# Altium PCB PCB.PcbDoc
Units mm, origin at the board's own origin, x right, y up, seen from the top; angles counter-clockwise.
Board outline 38.34 x 25.39 mm, 2 copper layers (Top Layer, Bottom Layer); 21 components, 37 nets, 158 pads, 75 vias.
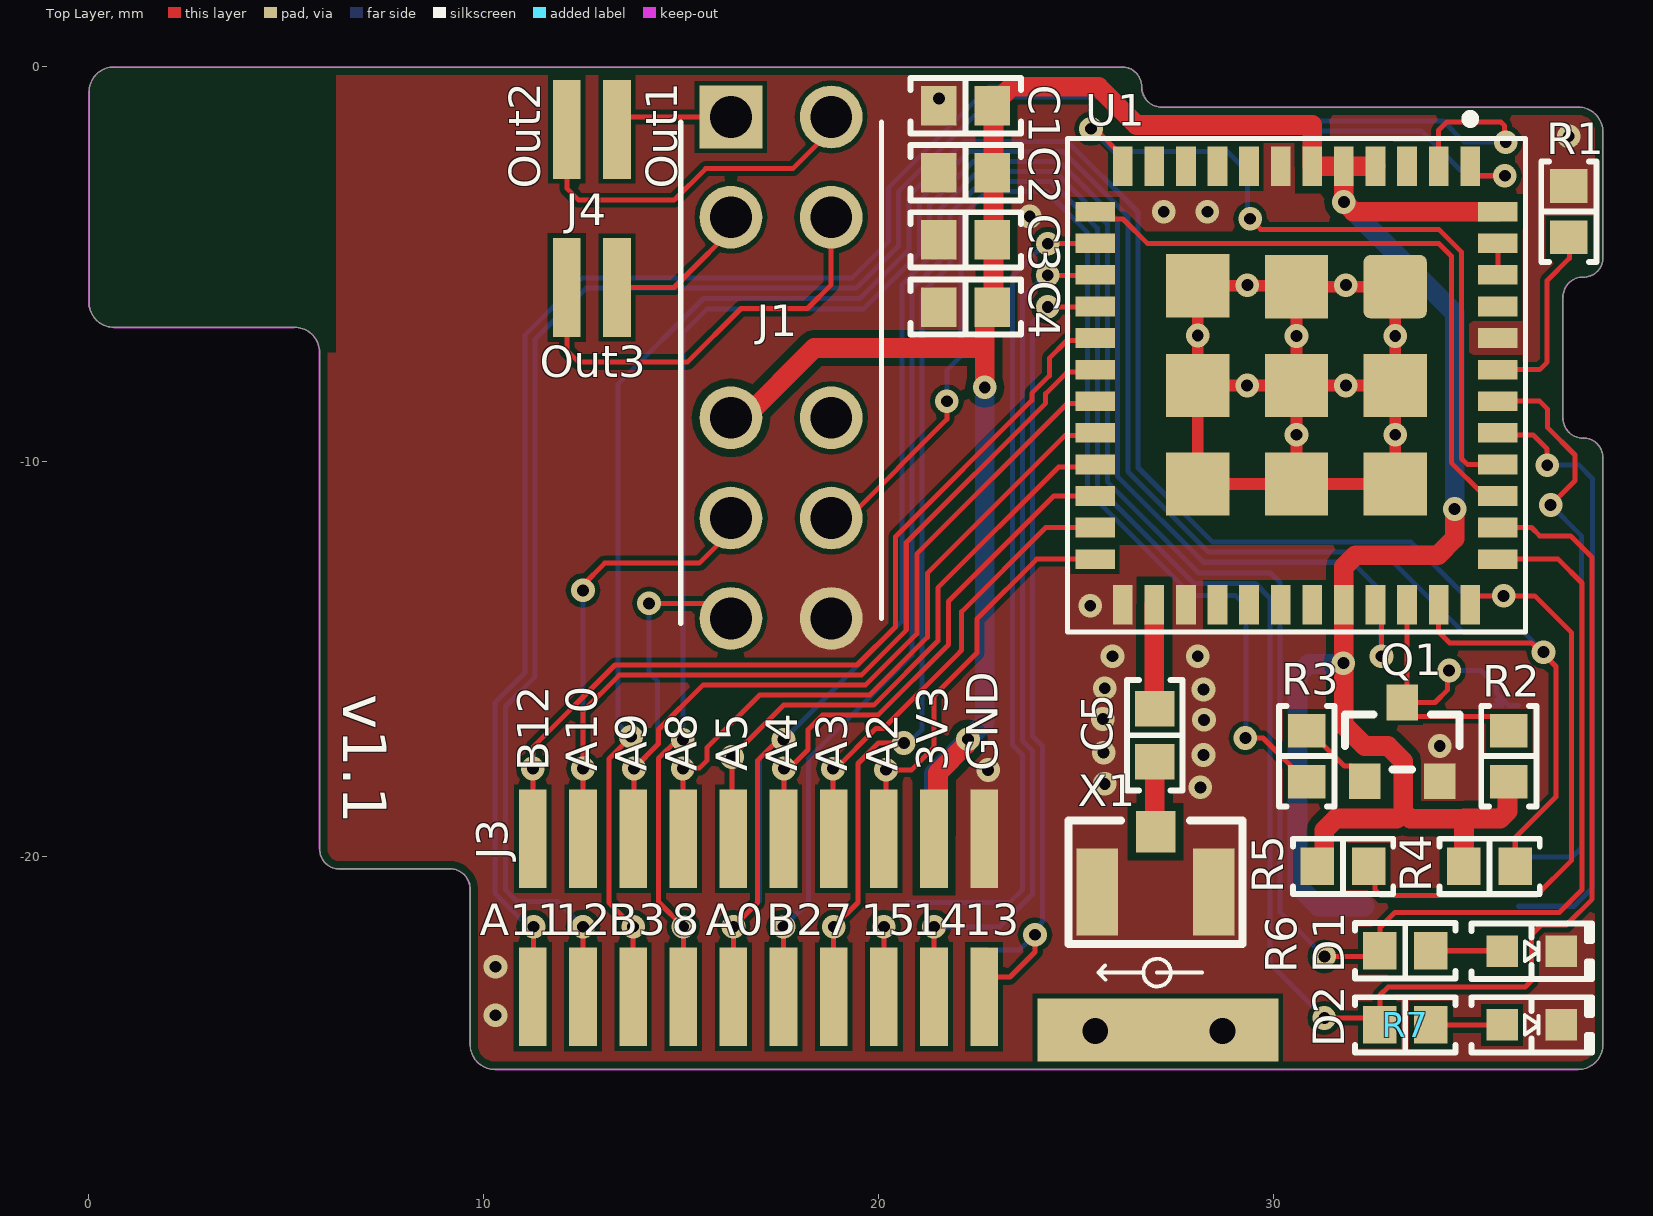
[diagram p0: Top Layer view]
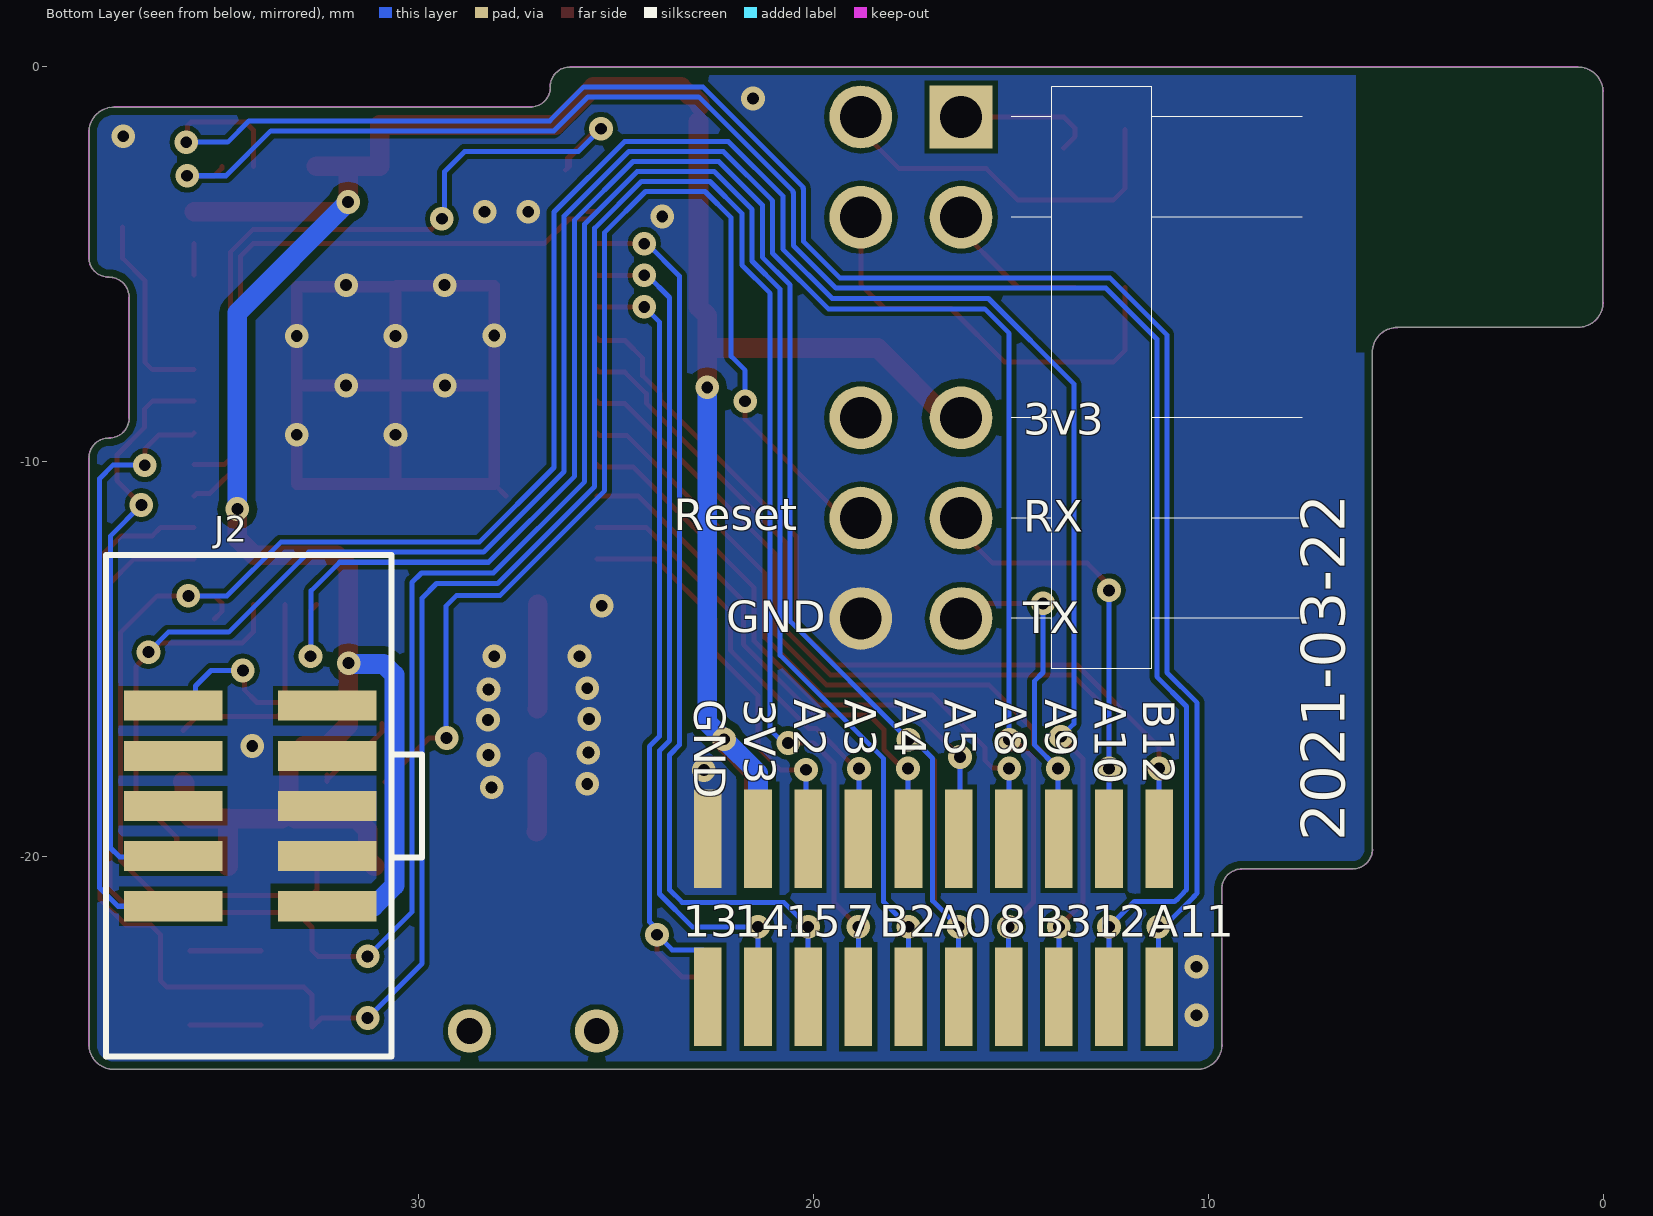
[diagram p1: Bottom Layer view, seen from below]
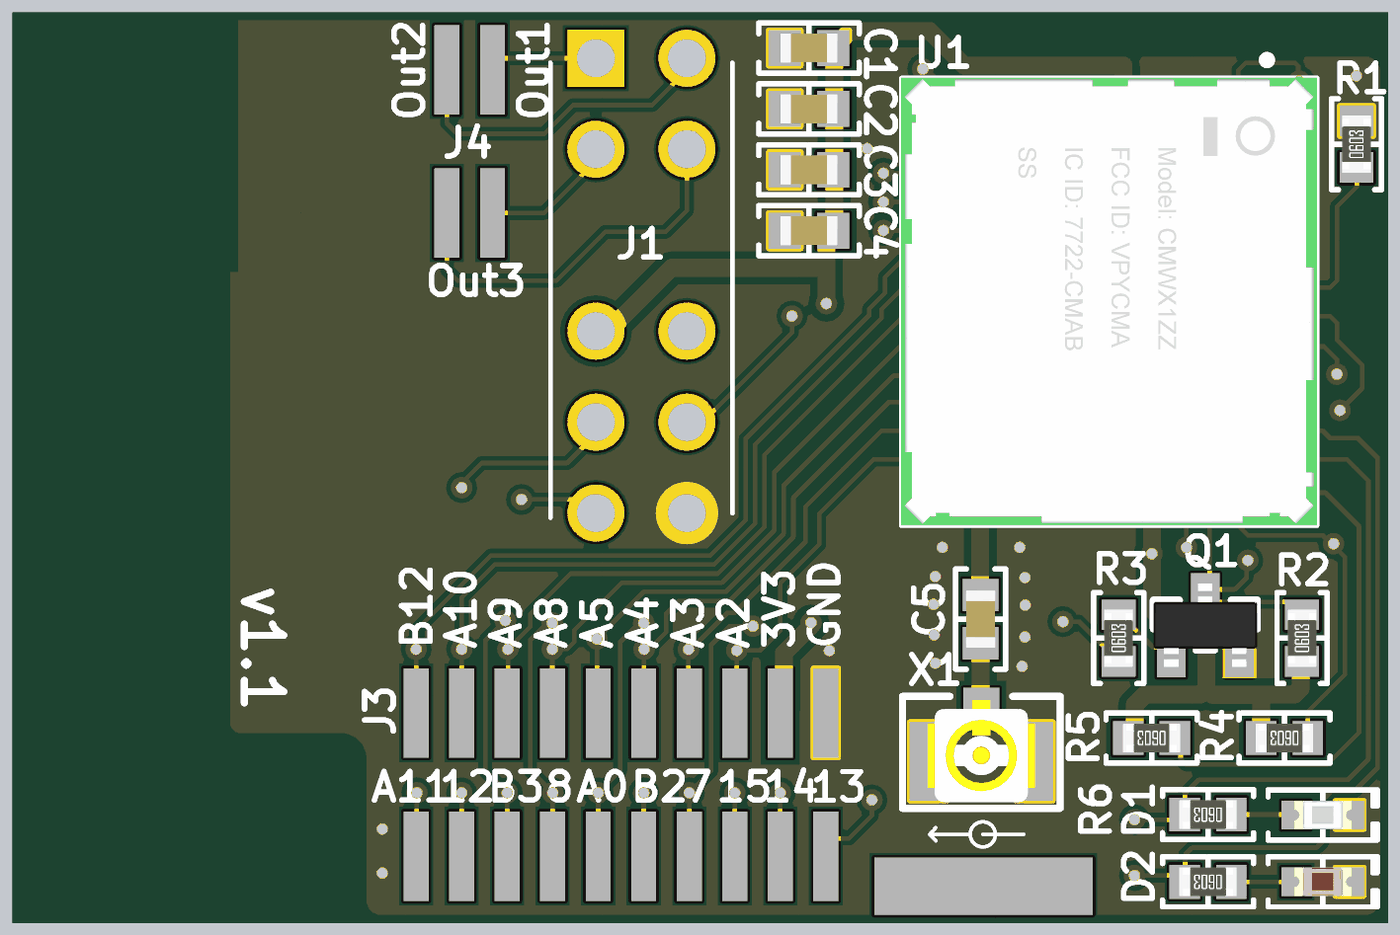
[diagram p2: 3D render of the assembled board from above, using the file's embedded part models]

## Layer stack, top to bottom
Top Solder: solder mask 0.0102, Solder Resist, Dk 3.5
Top Layer: signal copper 0.0356
Dielectric 1: dielectric 0.32, FR-4, Dk 4.8
Bottom Layer: signal copper 0.0356
Bottom Solder: solder mask 0.0102, Solder Resist, Dk 3.5

## Board outline
5.847,-19.82 5.847,-7.239 ccw(c5.205,-7.239) 5.205,-6.597 0.633,-6.597 cw(c0.633,-5.969) 0.005,-5.969 0.005,-0.635 cw(c0.633,-0.635) 0.633,-0.007 26.168,-0.007 cw(c26.168,-0.5) 26.661,-0.5 26.661,-0.516 ccw(c26.668,-0.516) 26.661,-0.516 ccw(c27.168,-0.516) 27.168,-1.023 ccw(c27.168,-0.516) 27.168,-1.023 37.717,-1.023 cw(c37.717,-1.651) 38.345,-1.651 38.345,-4.834 cw(c37.852,-4.834) 37.852,-5.327 37.836,-5.327 cw(c37.836,-5.834) 37.836,-5.327 ccw(c37.836,-5.334) 37.836,-5.327 ccw(c37.836,-5.834) 37.329,-5.834 37.329,-8.898 ccw(c37.336,-8.898) 37.329,-8.898 ccw(c37.836,-8.898) 37.836,-9.405 ccw(c37.836,-9.398) 37.836,-9.405 37.852,-9.405 cw(c37.852,-9.898) 38.345,-9.898 ccw(c38.352,-9.898) 38.347,-9.902 ccw(c38.352,-9.906) 38.345,-9.906 38.345,-24.765 cw(c37.717,-24.765) 37.717,-25.393 10.285,-25.393 cw(c10.285,-24.765) 9.657,-24.765 9.657,-20.82 ccw(c9.15,-20.82) 9.15,-20.313 6.34,-20.313 cw(c6.34,-19.82)

## Design rules (kind name [scope] priority, off if disabled: settings)
BoardOutlineClearance BoardOutlineClearance_BottomSIlk [OnLayer('Bottom Overlay')] p1: gap=0.05 ignorepadtopadclearanceinfootprint=FALSE
BoardOutlineClearance BoardOutlineClearance_TopSIlk [OnLayer('Top Overlay')] p2: gap=0.05 ignorepadtopadclearanceinfootprint=FALSE
BoardOutlineClearance [All] p3: gap=0.2 ignorepadtopadclearanceinfootprint=FALSE
Clearance Ant_Spacing [InPolygon vs (InNet('ANT') OR InNet('NetC5_2'))] p1: gap=0.2 ignorepadtopadclearanceinfootprint=FALSE
Clearance Ant_Spacing_1 [InPolygon vs InNet('+3.3V')] p2: gap=0.2 ignorepadtopadclearanceinfootprint=FALSE
Clearance [All] p3: gap=0.127 ignorepadtopadclearanceinfootprint=FALSE except(0.2: Arc-SMDPad Track-SMDPad; 0.25: Arc-Hole Track-Hole SMDPad-Hole THPad-Hole Via-Hole Fill-Hole Poly-Hole Region-Hole Text-Hole; 0.254: Arc-Via Track-Via)
ComponentClearance [All] p1: gap=0.127 collisioncheckmode=3 verticalgap=0.127 showdistances=TRUE
DiffPairsRouting [All] p1: maxlimit=0.254 minlimit=0.127 mostfreqgap=0.127 toplayer_minwidth=0.127 toplayer_maxwidth=25.4 toplayer_prefwidth=0.127 bottomlayer_minwidth=0.127 bottomlayer_maxwidth=25.4 bottomlayer_prefwidth=0.127 maxuncoupledlength=12.7
Height [All] p1: minheight=0 maxheight=1816.048 prefheight=12.7
HoleSize [All] p1: absolutevalues=TRUE maxlimit=6.3 minlimit=0.3 maxpercent=80.000 minpercent=20.000
HoleToHoleClearance [All] p1: gap=0.25 allowstackedmicrovias=FALSE
MinimumAnnularRing [All] p1: minimumring=0.076
MinimumSolderMaskSliver [All] p1: minsoldermaskwidth=0
PlaneClearance [All] p1: clearance=0.127
PlaneConnect PlaneConnectPowerPads [InPadClass('PowerPads')] p1: planeconnectstyle=Direct reliefexpansion=0.508 reliefentries=4 reliefconductorwidth=0.254 reliefairgap=0.254
PlaneConnect [All] p2: pad.planeconnectstyle=Relief pad.reliefexpansion=0.3 pad.reliefentries=4 pad.reliefconductorwidth=0.127 pad.reliefairgap=0.127 via.planeconnectstyle=Direct via.reliefexpansion=0.3 via.reliefentries=4 via.reliefconductorwidth=0.127 via.reliefairgap=0.127
PolygonConnect PolygonConnectPowerPads [All vs (InPadClass('PowerPads'))] p1: connectstyle=Direct reliefconductorwidth=0.254 reliefentries=4 polygonreliefangle="90 Angle" airgapwidth=0.254
PolygonConnect [All] p2: connectstyle=Direct reliefconductorwidth=0.127 reliefentries=4 polygonreliefangle="90 Angle" airgapwidth=0.127
RoutingVias [All] p1: holewidth=0.3 width=0.6 viastyle="Through Hole" minholewidth=0.3 minwidth=0.6 maxholewidth=0.6 maxwidth=6.6
SilkToSilkClearance [All] p1: silktosilkclearance=0
SilkToSolderMaskClearance [IsPad] p1: minsilkscreentomaskgap=0.1 clearancetoexposedcopper=TRUE
SolderMaskExpansion [All] p1: expansion=0.075 istentingtop=FALSE
Width Antenna [(InNet('ANT') OR InNet('NetC5_2'))] p1: maxlimit=0.5 minlimit=0.5 preferedwidth=0.5 minimp=50.000000 maximp=50.000000 favimp=50.000000
Width Signal [(InNet('PB*') OR InNet('PA*') OR InNet('DIO*') OR InNet('SWD*') OR InNet('I2C*'))] p2: maxlimit=0.254 minlimit=0.127 preferedwidth=0.127 minimp=50.000000 maximp=50.000000 favimp=50.000000
Width Power [InNet('+3.3V')] p3: maxlimit=2 minlimit=0.5 preferedwidth=0.5 minimp=50.000000 maximp=50.000000 favimp=50.000000
Width [All] p4: maxlimit=25.4 minlimit=0.127 preferedwidth=0.127 minimp=50.000000 maximp=50.000000 favimp=50.000000
20 further rules are at their usual default settings.

## Components (designator, comment, footprint, x,y, rotation, side; value= is the part's Value field where it differs from the comment)
C1 "10µF" "CAP 0603_1608" 22.204,-0.985 r180 top
C2 "10µF" "CAP 0603_1608" 22.204,-2.685 r180 top
C3 "1µF" "CAP 0603_1608" 22.204,-4.385 r180 top
C4 "0.1µF" "CAP 0603_1608" 22.204,-6.085 r0 top
C5 "47pF" "CAP 0603_1608" 26.994,-16.93 r270 top
D1 "Green" "LED 0603_1608 GREEN" 36.54,-22.4 r0 top
D2 "Red" "LED 0603_1608 RED" 36.54,-24.264 r0 top
J1 "C60565" C60565 16.26,-1.27 r0 top locked
J2 "JTAG Connector" 2x1.27x10 32.31,-21.26 r0 bottom
J3 "GPIO" 1.27X20 11.244,-23.55 r90 top
J4 "Pins" 1.27x4 12.104,-5.59 r0 top
Q1 "BC847CLT1G" "ON SEMI SOT-23-3" 33.264,-17.1 r90 top
R1 "10 kOhms" "RES 0603_1608" 37.483,-3.67 r90 top
R2 "10 kOhms" "RES 0603_1608" 35.964,-17.46 r90 top
R3 "10 kOhms" "RES 0603_1608" 30.844,-17.46 r90 top
R4 "4.7 kOhms" "RES 0603_1608" 35.474,-20.25 r180 top
R5 "4.7 kOhms" "RES 0603_1608" 31.764,-20.25 r180 top
R6 "470 Ohms" "RES 0603_1608" 33.339,-22.387 r180 top
R7 "470 Ohms" "RES 0603_1608" 33.339,-24.264 r180 top
U1 "Murata LoRa Module" CMWX1ZZABZ 30.584,-8.07 r270 top locked
X1 "U.FL-R-SMT(01)" "CON: u.Fl" 27.014,-20.9 r180 top

## Footprints (in the part's own frame and the unit in brackets; to place one, negate y for a bottom-side part, rotate by r counter-clockwise, add the part's x,y. Pads: shape width x height; smd on the part's side, far side on the other; paste and mask are expansions set on the pad)
1.27x4 [mm]
  rect 0.7x2.5 smd: 1(0,4) 2(1.27,4) 3(0,0) 4(1.27,0)
1.27X20 [mm]
  rect 2.5x0.7 smd: 1(0,0) 2(4,0) 3(0,-1.27) 4(4,-1.27) 5(0,-2.54) 6(4,-2.54) 7(0,-3.81) 8(4,-3.81) 9(0,-5.08) 10(4,-5.08) 11(0,-6.35) 12(4,-6.35) 13(0,-7.62) 14(4,-7.62) 15(0,-8.89) 16(4,-8.89) 17(0,-10.16) 18(4,-10.16) 19(0,-11.43) 20(4,-11.43)
  rect 2.5x0.7 smd far side: 1(0,0) 2(4,0) 3(0,-1.27) 4(4,-1.27) 5(0,-2.54) 6(4,-2.54) 7(0,-3.81) 8(4,-3.81) 9(0,-5.08) 10(4,-5.08) 11(0,-6.35) 12(4,-6.35) 13(0,-7.62) 14(4,-7.62) 15(0,-8.89) 16(4,-8.89) 17(0,-10.16) 18(4,-10.16) 19(0,-11.43) 20(4,-11.43)
2x1.27x10 [mm]
  rect 2.5x0.76 smd: 1(0,0) 2(3.9,0) 3(0,-1.27) 4(3.9,-1.27) 5(0,-2.54) 6(3.9,-2.54) 7(0,-3.81) 8(3.9,-3.81) 9(0,-5.08) 10(3.9,-5.08)
  silkscreen extent -2.4,-8.89 5.6,3.81
C60565 [mm] "Pin Header 12 2 right-angle,90degrees 2.54mm P=2.54mm Pin Header & Female Header RoHS"
  rect 1.59x1.59 hole 1.06: 1(0,0)
  round 1.59 hole 1.06: 2(2.54,0) 3(0,-2.54) 4(2.54,-2.54) 7(0,-7.62) 8(2.54,-7.62) 9(0,-10.16) 10(2.54,-10.16) 11(0,-12.7) 12(2.54,-12.7)
  silkscreen extent -1.27,-12.83 3.81,-0.13
"CAP 0603_1608" [mm] "Chip Capacitor, 2-Leads, Body 1.60x0.80mm, IPC Medium Density"
  rect 0.9x1 smd: 1(-0.675,0) 2(0.675,0)
  silkscreen extent -1.4,-0.7 1.4,0.7, body extent -0.8,-0.41 0.8,0.41, height 0.82
CMWX1ZZABZ [mm]
  rect 1x0.5 smd: 1(-5.55,4.4) 2(-5.55,3.6) 3(-5.55,2.8) 4(-5.55,2) 5(-5.55,1.2) 6(-5.55,0.4) 7(-5.55,-0.4) 8(-5.55,-1.2) 9(-5.55,-2) 10(-5.55,-2.8) 11(-5.55,-3.6) 12(-5.55,-4.4) 25(5.55,-4.4) 26(5.55,-3.6) 27(5.55,-2.8) 28(5.55,-2) 29(5.55,-1.2) 30(5.55,-0.4) 31(5.55,0.4) 32(5.55,1.2) 33(5.55,2) 34(5.55,2.8) 35(5.55,3.6) 36(5.55,4.4)
  rect 0.5x1 smd: 13(-4.4,-5.1) 14(-3.6,-5.1) 15(-2.8,-5.1) 16(-2,-5.1) 17(-1.2,-5.1) 18(-0.4,-5.1) 19(0.4,-5.1) 20(1.2,-5.1) 21(2,-5.1) 22(2.8,-5.1) 23(3.6,-5.1) 24(4.4,-5.1) 37(4.4,5.1) 38(3.6,5.1) 39(2.8,5.1) 40(2,5.1) 41(1.2,5.1) 42(0.4,5.1) 43(-0.4,5.1) 44(-1.2,5.1) 45(-2,5.1) 46(-2.8,5.1) 47(-3.6,5.1) 48(-4.4,5.1)
  rrect20% 1.6x1.6 smd: 49(-2.5,2.5)
  rect 1.6x1.6 smd: 50(0,2.5) 51(2.5,2.5) 52(-2.5,0) 53(0,0) 54(2.5,0) 55(-2.525,-2.5) 56(0,-2.5) 57(2.5,-2.5)
  silkscreen extent -6.85,-5.8 6.25,5.8, body extent -6.26,-5.8 6.24,5.8, height 1.76
"CON: u.Fl" [mm]
  rect 1x1.05 smd: 1(0,-1.525)
  rect 1.05x2.2 smd: 2(-1.475,0) 2(1.475,0)
  silkscreen extent -2.2,-1.81 2.2,1.31, body extent -1.5,-1.71 1.5,1.14, height 1.27
"LED 0603_1608 GREEN" [mm] "Chip Diode, 2-Leads, Body 1.60x0.80mm, IPC Medium Density"
  rect 0.8x0.8 smd: 1(-0.75,0) 2(0.75,0)
  silkscreen extent -1.52,-0.7 1.52,0.7, body extent -0.8,-0.4 0.8,0.4, height 0.53
"LED 0603_1608 RED" [mm] "Chip Diode, 2-Leads, Body 1.60x0.80mm, IPC Medium Density"
  rect 0.8x0.8 smd: 1(-0.75,0) 2(0.75,0)
  silkscreen extent -1.52,-0.7 1.52,0.7, body extent -0.8,-0.4 0.8,0.4, height 0.53
"ON SEMI SOT-23-3" [mm] "SOT23, 3-Leads, Body 2.90x2.40mm, Pitch 0.95mm, IPC Medium Density"
  rect 0.9x0.8 smd: 1(-1,0.95) 2(-1,-0.95) 3(1,0)
  silkscreen extent -0.7,-1.45 0.7,1.45, body extent -1.16,-1.45 1.16,1.45, height 1
"RES 0603_1608" [mm] "Chip Resistor, 2-Leads, Body 1.60x0.80mm, IPC Medium Density"
  rect 0.85x0.95 smd: 1(-0.65,0) 2(0.65,0)
  silkscreen extent -1.27,-0.7 1.27,0.7, body extent -0.8,-0.4 0.8,0.4, height 0.45

## Part data
C1 C2: library part GRM188R60J106ME47D, "CAP CER 10UF 6.3V X5R 0603", Device Package="0603 (1608 Metric)", Manufacturer="Murata Electronics", Operating Temperature="-55°C ~ 85°C", Supplier Part Number 1=490-3896-1-ND, Temperature Coefficient=X5R, Tolerance=±20%, Voltage - Rated=6.3V, Applications="General Purpose", Capacitance=10µF, ComponentLink1Description=Datasheet, ComponentLink1URL=https://www.murata.com/~/media/webrenewal/support/library/catalog/products/capacitor/mlcc/c02e.ashx?la=en-us, ComponentLink2Description="DigiKey Link", ComponentLink2URL=http://digikey.com/product-detail/en/murata-electronics/GRM188R60J106ME47D/490-3896-1-ND/965938, LastUpdated="2020-09-02 01:03:35.500000", Lifecycle Status=Active, Minimum Order=1, Mounting Type="Surface Mount, MLCC", Package / Case="0603 (1608 Metric)", Packaging=TapeAndReel, Part Number=GRM188R60J106ME47D, Part Status=Active, PartId=2351, Price=0.03, Series=GRM, Size / Dimension="0.063 L x 0.031 W (1.60mm x 0.80mm)", Supplier 1=DigiKey, Thickness (Max)="0.035 (0.90mm)"
C3: library part GCM188R71C105KA64D, "CAP CER 1UF 16V X7R 0603", Device Package="0603 (1608 Metric)", Manufacturer="Murata Electronics", Operating Temperature="-55°C ~ 125°C", Ratings=AEC-Q200, Supplier Part Number 1=490-5241-1-ND, Temperature Coefficient=X7R, Tolerance=±10%, Voltage - Rated=16V, Applications=Automotive, Capacitance=1µF, ComponentLink1Description=Datasheet, ComponentLink1URL=https://www.murata.com/~/media/webrenewal/support/library/catalog/products/capacitor/mlcc/c03e.ashx?la=en-us, ComponentLink2Description="DigiKey Link", ComponentLink2URL=http://digikey.com/product-detail/en/murata-electronics/GCM188R71C105KA64D/490-5241-1-ND/1979252, LastUpdated="2020-09-02 01:03:17.027000", Lifecycle Status=Active, Minimum Order=1, Mounting Type="Surface Mount, MLCC", Package / Case="0603 (1608 Metric)", Packaging=TapeAndReel, Part Number=GCM188R71C105KA64D, Part Status=Active, PartId=12672, Price=0.04, Series=GCM, Size / Dimension="0.063 L x 0.031 W (1.60mm x 0.80mm)", Supplier 1=DigiKey, Thickness (Max)="0.035 (0.90mm)"
C4: library part GCJ188R71C104KA01D, "CAP CER 0.1UF 16V X7R 0603", Device Package="0603 (1608 Metric)", Manufacturer="Murata Electronics", Operating Temperature="-55°C ~ 125°C", Ratings=AEC-Q200, Supplier Part Number 1=490-5796-1-ND, Temperature Coefficient=X7R, Tolerance=±10%, Voltage - Rated=16V, Applications="Automotive, Boardflex Sensitive", Capacitance=0.1µF, ComponentLink1Description=Datasheet, ComponentLink1URL=https://www.murata.com/~/media/webrenewal/support/library/catalog/products/capacitor/mlcc/c03e.ashx?la=en-us, ComponentLink2Description="DigiKey Link", ComponentLink2URL=http://digikey.com/product-detail/en/murata-electronics/GCJ188R71C104KA01D/490-5796-1-ND/2783830, Features="Soft Termination", LastUpdated="2020-09-02 01:03:00.960000", Lifecycle Status=Active, Minimum Order=1, Mounting Type="Surface Mount, MLCC", Package / Case="0603 (1608 Metric)", Packaging=TapeAndReel, Part Number=GCJ188R71C104KA01D, Part Status=Active, PartId=17928, Price=0.05, Series=GCJ, Size / Dimension="0.063 L x 0.031 W (1.60mm x 0.80mm)", Supplier 1=DigiKey, Thickness (Max)="0.035 (0.90mm)"
C5: library part GCM1885C2A470FA16D, "CAP CER 47PF 100V C0G/NP0 0603", Device Package="0603 (1608 Metric)", Manufacturer="Murata Electronics", Operating Temperature="-55°C ~ 125°C", Ratings=AEC-Q200, Supplier Part Number 1=490-16408-1-ND, Temperature Coefficient="C0G, NP0", Tolerance=±1%, Voltage - Rated=100V, Applications=Automotive, Capacitance=47pF, ComponentLink1Description=Datasheet, ComponentLink1URL=https://search.murata.co.jp/Ceramy/image/img/A01X/G101/ENG/GCM1885C2A470FA16-01.pdf, ComponentLink2Description="DigiKey Link", ComponentLink2URL=http://digikey.com/product-detail/en/murata-electronics/GCM1885C2A470FA16D/490-16408-1-ND/7363390, LastUpdated="2020-09-02 01:03:24.863000", Lifecycle Status=Active, Minimum Order=1, Mounting Type="Surface Mount, MLCC", Package / Case="0603 (1608 Metric)", Packaging=TapeAndReel, Part Number=GCM1885C2A470FA16D, Part Status=Active, PartId=8408, Price=0.04, Series=GCM, Size / Dimension="0.063 L x 0.031 W (1.60mm x 0.80mm)", Supplier 1=DigiKey, Thickness (Max)="0.035 (0.90mm)"
D1: library part APT1608CGCK, "LED GREEN CLEAR CHIP SMD", Current - Test=20mA, Device Package="0603 (1608 Metric)", Lens Color=Colorless, Manufacturer=Kingbright, Millicandela Rating=50mcd, Supplier Device Package="Chip LED", Supplier Part Number 1=754-1116-1-ND, Voltage - Forward (Vf) (Typ)=2.1V, Color=Green, ComponentLink1Description=Datasheet, ComponentLink1URL=http://www.kingbrightusa.com/images/catalog/SPEC/APT1608CGCK.pdf, ComponentLink2Description="DigiKey Link", ComponentLink2URL=http://digikey.com/product-detail/en/kingbright/APT1608CGCK/754-1116-1-ND/1747833, Configuration=Standard, Height (Max)=0.75mm, LastUpdated="2020-09-02 01:20:41.777000", Lens Size="1.20mm x 0.80mm", Lens Style="Rectangle with Flat Top", Lens Transparency=Clear, Lifecycle Status=Active, Minimum Order=1, Mounting Type="Surface Mount", Package / Case="0603 (1608 Metric)", Packaging=TapeAndReel, Part Number=APT1608CGCK, Part Status=Active, PartId=664, Price=0.07, Series=-, Size / Dimension="1.60mm L x 0.80mm W", Supplier 1=DigiKey, Viewing Angle=120°, Wavelength - Dominant=570nm, Wavelength - Peak=574nm
D2: library part APT1608EC, "LED RED CLEAR CHIP SMD", Current - Test=20mA, Device Package="0603 (1608 Metric)", Lens Color=Colorless, Manufacturer=Kingbright, Millicandela Rating=8mcd, Supplier Device Package="Chip LED", Supplier Part Number 1=754-1117-1-ND, Voltage - Forward (Vf) (Typ)=2V, Color=Red, ComponentLink1Description=Datasheet, ComponentLink1URL=http://www.kingbrightusa.com/images/catalog/SPEC/APT1608EC.pdf, ComponentLink2Description="DigiKey Link", ComponentLink2URL=http://digikey.com/product-detail/en/kingbright/APT1608EC/754-1117-1-ND/1747834, Configuration=Standard, Height (Max)=0.75mm, LastUpdated="2020-09-02 01:20:55.660000", Lens Size="1.20mm x 0.80mm", Lens Style="Rectangle with Flat Top", Lens Transparency=Clear, Lifecycle Status=Active, Minimum Order=1, Mounting Type="Surface Mount", Package / Case="0603 (1608 Metric)", Packaging=TapeAndReel, Part Number=APT1608EC, Part Status=Active, PartId=458, Price=0.06, Series=-, Size / Dimension="1.60mm L x 0.80mm W", Supplier 1=DigiKey, Viewing Angle=120°, Wavelength - Dominant=617nm, Wavelength - Peak=627nm
J1: "Pin Header 12 2 right-angle，90degrees 2.54mm P=2.54mm Pin Header & Female Header RoHS", Package=None, Availability=Unavailable, Check_prices=https://www.snapeda.com/parts/BG040-14-A-0300-0300-N-G/Global%20Connector%20Technology/view-part/2751851/?ref=eda, MF="Global Connector Technology", MP=BG040-14-A-0300-0300-N-G, Price=None, SnapEDA_Link=https://www.snapeda.com/parts/BG040-14-A-0300-0300-N-G/Global%20Connector%20Technology/view-part/2751851/?ref=snap
Q1: "TRANS NPN 45V 0.1A SOT23", Current - Collector (Ic) (Max)=100mA, Current - Collector Cutoff (Max)="15nA (ICBO)", DC Current Gain (hFE) (Min) @ Ic, Vce="420 @ 2mA, 5V", Frequency - Transition=100MHz, Manufacturer="ON Semiconductor", Operating Temperature="-55°C ~ 150°C (TJ)", Package / Case="TO-236-3, SC-59, SOT-23-3", Power - Max=300mW, Supplier Device Package="SOT-23-3 (TO-236)", Supplier Part Number 1=BC847CLT1GOSCT-ND, Voltage - Collector Emitter Breakdown (Max)=45V, ComponentLink1Description=Datasheet, ComponentLink1URL=http://www.onsemi.com/pub/Collateral/BC846ALT1-D.PDF, ComponentLink2Description="DigiKey Link", ComponentLink2URL=http://digikey.com/product-detail/en/on-semiconductor/BC847CLT1G/BC847CLT1GOSCT-ND/917836, LastUpdated="2020-09-02 01:30:09.047000", Lifecycle Status=Active, Minimum Order=1, Mounting Type="Surface Mount", Packaging=TapeAndReel, Part Number=BC847CLT1G, Part Status=Active, PartId=252, Price=0.02, Series=-, Supplier 1=DigiKey, Transistor Type=NPN, Vce Saturation (Max) @ Ib, Ic="600mV @ 5mA, 100mA"
R1 R2 R3: library part RT0603DRD0710KL, "RES SMD 10K OHM 0.5% 1/10W 0603", Device Package="0603 (1608 Metric)", Manufacturer=Yageo, Operating Temperature="-55°C ~ 155°C", Power (Watts)="0.1W, 1/10W", Supplier Device Package=0603, Supplier Part Number 1=311-10KDCT-ND, Temperature Coefficient=±25ppm/°C, Tolerance=±0.5%, ComponentLink1Description=Datasheet, ComponentLink1URL=https://www.yageo.com/upload/media/product/productsearch/datasheet/rchip/PYu-RT_1-to-0.01_RoHS_L_11.pdf, ComponentLink2Description="DigiKey Link", ComponentLink2URL=http://digikey.com/product-detail/en/yageo/RT0603DRD0710KL/311-10KDCT-ND/1035680, Composition="Thin Film", Height - Seated (Max)="0.022 (0.55mm)", LastUpdated="2020-09-02 01:10:23.407000", Lifecycle Status=Active, Minimum Order=1, Number of Terminations=2, Package / Case="0603 (1608 Metric)", Packaging=TapeAndReel, Part Number=RT0603DRD0710KL, Part Status=Active, PartId=5487, Price=0.02, Resistance="10 kOhms", Series=RT, Size / Dimension="0.063 L x 0.031 W (1.60mm x 0.80mm)", Supplier 1=DigiKey
R4 R5: library part AT0603BRD074K7L, "RES SMD 4.7K OHM 0.1% 1/10W 0603", Device Package="0603 (1608 Metric)", Manufacturer=Yageo, Operating Temperature="-55°C ~ 155°C", Power (Watts)="0.1W, 1/10W", Ratings=AEC-Q200, Supplier Device Package=0603, Supplier Part Number 1=YAG2113CT-ND, Temperature Coefficient=±25ppm/°C, Tolerance=±0.1%, ComponentLink1Description=Datasheet, ComponentLink1URL=http://www.yageo.com/documents/recent/PYu-AT_51_RoHS_L_5.pdf, ComponentLink2Description="DigiKey Link", ComponentLink2URL=http://digikey.com/product-detail/en/yageo/AT0603BRD074K7L/YAG2113CT-ND/5139561, Composition="Thin Film", Features="Anti-Sulfur, Automotive AEC-Q200, Moisture Resistant", Height - Seated (Max)="0.022 (0.55mm)", LastUpdated="2020-09-02 01:10:11.327000", Lifecycle Status=Active, Minimum Order=1, Number of Terminations=2, Package / Case="0603 (1608 Metric)", Packaging=TapeAndReel, Part Number=AT0603BRD074K7L, Part Status=Active, PartId=11458, Price=0.08, Resistance="4.7 kOhms", Series=AT, Size / Dimension="0.063 L x 0.031 W (1.60mm x 0.80mm)", Supplier 1=DigiKey
R6 R7: library part AT0603FRE07470RL, "RES SMD 470 OHM 1% 1/10W 0603", Device Package="0603 (1608 Metric)", Manufacturer=Yageo, Operating Temperature="-55°C ~ 155°C", Power (Watts)="0.1W, 1/10W", Ratings=AEC-Q200, Supplier Device Package=0603, Supplier Part Number 1=YAG2128CT-ND, Temperature Coefficient=±50ppm/°C, Tolerance=±1%, ComponentLink1Description=Datasheet, ComponentLink1URL=http://www.yageo.com/documents/recent/PYu-AT_51_RoHS_L_5.pdf, ComponentLink2Description="DigiKey Link", ComponentLink2URL=http://digikey.com/product-detail/en/yageo/AT0603FRE07470RL/YAG2128CT-ND/5139576, Composition="Thin Film", Features="Anti-Sulfur, Automotive AEC-Q200, Moisture Resistant", Height - Seated (Max)="0.022 (0.55mm)", LastUpdated="2020-09-02 01:10:20.073000", Lifecycle Status=Active, Minimum Order=1, Number of Terminations=2, Package / Case="0603 (1608 Metric)", Packaging=TapeAndReel, Part Number=AT0603FRE07470RL, Part Status=Active, PartId=7105, Price=0.02, Resistance="470 Ohms", Series=AT, Size / Dimension="0.063 L x 0.031 W (1.60mm x 0.80mm)", Supplier 1=DigiKey
U1: library part CMWX1ZZABZ-078, Manufacturer=Murata, Manufacturer P/N="LoRa Module ES0", Provided by=Murata
X1: library part Connector_uFL, "Connector u.FL", Frequency=6GHz, Manufacturer="Hirose Electric", ValueManufacturerPartNumber="Connector u.FL, 50 Ohm, 6GHz", HelpURL=https://www.digikey.com/product-detail/en/hirose-electric-co-ltd/U.FL-R-SMT-01/H9161-ND/513010, Impedance="50 Ohm", PartNumber=U.FL-R-SMT(01), TypeConnector="Connector u.FL"

## Free pads (board coordinates)
  round 1.1 hole 0.65: 2(25.49,-24.42) 2(28.71,-24.42)
  rect 6.1x1.6 smd: 2(27.074,-24.39)

## Via types
v1: diameter 0.6, hole 0.3, Top Layer to Bottom Layer, tented both sides, 75 vias

## Nets (pads, with @x,y where several pads share a name; then routed paths per layer and width w, separated by ;. In a path a pad name is that pad's centre, name@x,y a point inside that pad or via, vN(x,y) a via of type N, cw(c..) or ccw(c..) an arc to the next point about the centre after c; other vN are vias at no path point)
+3.3V: C1.1 C2.1 C3.1 C4.2 J1.7 J2.1 J3.18 R2.1 R4.2 R5.2 U1.4 U1.5 U1.6 U1.32 U1.48 | length 81.2
  Top Layer w0.5: J1.7@16.6,-8.89 18.37,-7.12 22.69,-7.12 ; J3.18@21.404,-19.55 21.504,-19.45 21.504,-17.879 22.216,-17.167 22.216,-17.078 v1(22.264,-17.03) ; v1(22.69,-8.12) 22.69,-7.12 ; C1.1 22.879,-0.935 23.079,-0.735 23.129,-0.735 23.356,-0.508 25.571,-0.508 26.535,-1.473 30.98,-1.473 U1.6@30.98,-2.5 ; C1.1@22.909,-1.395 22.909,-6.085 22.69,-6.304 22.69,-7.12 ; U1.6 U1.5 ; R5.2 31.289,-20.075 31.289,-19.333 31.582,-19.04 33.123,-19.04 33.29,-18.873 ; U1.32@31.781,-13.617 31.781,-15.103 31.781,-16.667 32.314,-17.2 32.9,-17.2 33.29,-17.59 33.29,-18.873 ; U1.32 31.784,-12.663 32.077,-12.37 34.17,-12.37 34.59,-11.95 v1(34.59,-11.2) ; U1.4 U1.5 ; R4.2 34.824,-19.045 ; U1.48 32.03,-3.67 v1(31.784,-3.424) U1.5 ; R2.1 35.929,-18.145 35.929,-18.855 35.744,-19.04 34.829,-19.04 34.824,-19.045 ; 33.29,-18.873 33.462,-19.045 34.824,-19.045
  Bottom Layer w0.5: J3.18@21.404,-19.57 21.404,-19.55 21.404,-17.89 v1(22.264,-17.03) 22.69,-16.604 v1(22.69,-8.12) ; v1(31.772,-15.103) 31.753,-15.122 30.888,-15.122 30.61,-15.4 30.61,-20.737 31.143,-21.27 32.3,-21.27 J2.1 ; v1(31.784,-3.424) 34.59,-6.23 v1(34.59,-11.2)
ANT: C5.1 U1.26 | length 2.6
  Top Layer w0.5: U1.26 26.984,-16.245 C5.1
DIO0: U1.13 U1.39 | length 16.5
  Top Layer w0.127: U1.13@25.734,-3.67 U1.13 25.67,-3.856 26.19,-3.856 26.815,-4.481 34.195,-4.481 34.506,-4.792 34.506,-10.025 35.287,-10.807 35.621,-10.807 U1.39
DIO1: U1.12 U1.40 | length 19.6
  Top Layer w0.127: v1(25.38,-1.57) 25.484,-1.57 U1.12@26.184,-2.27 ; U1.12@25.997,-2.13 U1.12@26.184,-2.317 ; U1.12@26.276,-2.612 U1.12@26.23,-2.566 ; v1(29.41,-3.85) 29.676,-4.116 34.189,-4.116 34.76,-4.687 34.76,-9.92 34.91,-10.07 U1.40 ; U1.12@26.184,-2.317 U1.12@26.184,-2.27 ; U1.12@26.184,-2.317 U1.12 U1.12@26.23,-2.566 ; U1.12@26.184,-2.27 26.23,-2.316 U1.12@26.23,-2.566
  Bottom Layer w0.127: v1(25.38,-1.57) 25.954,-2.144 28.832,-2.144 29.34,-2.652 29.34,-3.78 v1(29.41,-3.85)
GND: C1.2 C2.2 C3.2 C4.1 D1.2 D2.2 J1.12 J2.3 J2.5 J3.20 Q1.2 R1.2 U1.7 U1.25 U1.27 U1.44 U1.49 U1.50 U1.51 U1.52 U1.53 U1.54 U1.55 U1.56 U1.57 X1.2 | length 30.6
  Top Layer w0.127: U1.57@27.784,-10.87 U1.57 ; U1.52@30.559,-5.545 U1.52
  Top Layer w0.3: U1.52@30.559,-5.545 U1.55 U1.56 ; U1.56 U1.53 ; U1.56 U1.57 U1.54 ; U1.54 U1.53 ; U1.54 U1.51 U1.50 ; U1.53 U1.52 U1.49 U1.50 ; U1.53 U1.50
  Bottom Layer w0.127: v1@22.674,-17.79 22.693,-17.809 v1(22.774,-17.809)
  other v1: 10.3,-24.02 10.3,-22.793 28.15,-18.25 25.73,-18.16 28.23,-17.43 25.7,-17.37 34.214,-17.2 28.24,-16.54 25.68,-16.52 28.23,-15.77 25.73,-15.74 25.924,-14.928 28.084,-14.928 25.36,-13.65 30.584,-9.32 33.084,-9.32 29.334,-8.07 31.834,-8.07 30.584,-6.82 33.084,-6.82 28.084,-6.807 29.34,-5.53 31.834,-5.53 23.83,-3.79 27.223,-3.67 28.327,-3.67 37.48,-1.76 21.529,-0.805
I2C_SCL: J3.7 R4.1 U1.35 | length 63.2
  Top Layer w0.127: v1(15.043,-17.04) 14.9,-17.04 14.426,-17.514 14.426,-21.152 v1(15.054,-21.78) 15.054,-23.55 J3.7@15.054,-23.57 ; U1.35 34.184,-14.314 34.46,-14.59 36.534,-14.59 36.807,-14.863 36.851,-14.863 36.851,-14.885 37.154,-15.188 37.154,-18.49 36.124,-19.52 R4.1
  Bottom Layer w0.127: v1(15.043,-17.04) 15.044,-17.039 15.044,-6.75 15.664,-6.13 19.624,-6.13 21.04,-4.714 21.04,-3.395 21.044,-3.391 21.044,-3.38 22.28,-2.144 24.675,-2.144 26.316,-3.785 26.316,-10.255 28.355,-12.294 32.784,-12.294 34.81,-14.32 36.338,-14.32 v1(36.842,-14.824) ; J3.7@15.054,-24.47 15.054,-23.55 v1(15.054,-21.78)
I2C_SDA: J3.5 R5.1 U1.36 | length 67.7
  Top Layer w0.127: v1(13.732,-16.968) 13.17,-17.53 13.17,-21.166 v1(13.784,-21.78) 13.784,-23.55 J3.5@13.784,-23.57 ; R5.1@32.414,-20.2 32.575,-20.361 32.575,-20.841 32.722,-20.989 36.658,-20.989 37.551,-20.095 37.551,-14.334 36.617,-13.4 v1(35.83,-13.4) 35.17,-13.4 34.984,-13.587 U1.36 34.984,-13.8 U1.36@35.17,-13.986
  Bottom Layer w0.127: v1(13.732,-16.968) 13.404,-16.64 13.404,-8.031 15.565,-5.87 19.525,-5.87 20.774,-4.621 20.774,-3.27 22.154,-1.89 24.781,-1.89 26.57,-3.679 26.57,-10.15 28.46,-12.04 33.49,-12.04 34.85,-13.4 v1(35.83,-13.4) ; J3.5@13.784,-23.57 13.784,-23.55 v1(13.784,-21.78)
MCU_nRST: J2.10 Q1.3 R2.2 U1.34 | length 10.2
  Top Layer w0.127: U1.34 33.384,-15.98 Q1.3 ; v1@34.418,-15.322 34.413,-15.327 34.413,-15.78 34.094,-16.1 Q1.3 ; R2.2 35.603,-16.448 33.563,-16.448 33.264,-16.15 Q1.3
  Bottom Layer w0.127: v1(34.45,-15.29) 35.256,-15.29 35.65,-15.684 35.65,-15.863 35.967,-16.18 J2.10 ; J2.10@35.34,-16.18 35.794,-16.18 J2.10@35.65,-16.036
NetC5_2: C5.2 X1.1 | length 1.8
  Top Layer w0.5: C5.2 26.994,-19.355 X1.1
NetD1_1: D1.1 R6.1 | length 1.8
  Top Layer w0.127: R6.1 D1.1@35.784,-22.387
NetD2_1: D2.1 R7.1 | length 1.8
  Top Layer w0.127: R7.1 D2.1@35.784,-24.264
NetJ1_1: J1.1 J4.2 | length 4
  Top Layer w0.127: J4.2@13.661,-2.056 13.374,-1.77 J4.2 13.374,-1.557 13.661,-1.27 J1.1@16.6,-1.27
NetJ1_2: J1.2 J4.1 | length 9.9
  Top Layer w0.127: J4.1 12.104,-3.08 12.404,-3.38 14.82,-3.38 15.62,-2.58 17.83,-2.58 19.14,-1.27 J1.2@19.14,-1.624
NetJ1_3: J1.3 J4.4 | length 4
  Top Layer w0.127: J4.4 14.82,-5.59 J1.3@16.6,-3.81
NetJ1_4: J1.4 J4.3 | length 10.9
  Top Layer w0.127: J4.3 12.104,-7.18 12.404,-7.48 15.157,-7.48 16.517,-6.12 18.199,-6.12 18.8,-5.519 J1.4
NetJ1_10: J1.10 R3.1 | length 30.1
  Top Layer w0.127: J1.10@19.14,-11.294 19.14,-11.43 19.229,-11.43 21.73,-8.929 v1(21.73,-8.47) ; v1(29.29,-17) 29.734,-17 R3.1
  Bottom Layer w0.127: v1(21.73,-8.47) 21.73,-7.687 22.084,-7.333 22.084,-3.82 22.744,-3.16 24.254,-3.16 25.285,-4.191 25.285,-10.735 27.934,-13.384 29.034,-13.384 29.3,-13.65 29.3,-16.99 v1(29.29,-17)
NetQ1_1: Q1.1 R3.2 | length 2.2
  Top Layer w0.127: R3.2@30.834,-16.82 R3.2 ; R3.2@30.924,-16.63 30.924,-16.84 31.798,-17.713 31.977,-17.713 32.314,-18.05 Q1.1 ; Q1.1@32.314,-17.99 Q1.1@32.314,-17.94
NetR1_1: R1.1 U1.43 | length 5
  Top Layer w0.127: U1.43 36.744,-7.67 36.934,-7.48 36.934,-5.412 37.494,-4.852 R1.1@37.494,-4.06
NetU1_46: U1.46 U1.47 | length 0.8
  Top Layer w0.127: U1.46 U1.47
PA0: J3.9 U1.33 | length 52.5
  Top Layer w0.127: J3.9@16.324,-23.57 16.324,-23.55 v1(16.324,-21.78) 16.938,-21.166 16.938,-17.563 17.461,-17.04 v1(17.594,-17.04) ; U1.33 32.737,-13.773 v1(32.737,-14.928)
  Bottom Layer w0.127: J3.9@16.324,-23.57 16.324,-23.55 v1(16.324,-21.78) 16.98,-21.124 16.98,-17.52 v1@17.527,-16.973 ; v1(17.594,-17.04) 20.588,-14.046 20.588,-5.526 21.294,-4.82 21.294,-3.5 22.396,-2.398 24.57,-2.398 26.047,-3.875 26.047,-10.366 28.229,-12.548 31.998,-12.548 32.72,-13.27 32.72,-14.911 v1(32.737,-14.928)
PA2: J3.16 U1.24 | length 12.4
  Top Layer w0.127: J3.16@20.134,-19.57 20.19,-19.514 v1(20.19,-17.804) 20.837,-17.804 21.404,-17.237 21.404,-15.933 22.488,-14.848 22.488,-13.985 24.003,-12.47 U1.24
  Bottom Layer w0.127: J3.16@20.134,-19.57 20.19,-19.514 v1(20.19,-17.804)
PA3: J3.14 U1.23 | length 13.3
  Top Layer w0.127: J3.14@18.844,-19.55 v1(18.844,-17.774) 18.912,-17.774 19.933,-16.753 20.127,-16.753 22.067,-14.813 ; 22.07,-14.81 22.104,-14.776 22.104,-13.799 24.233,-11.67 U1.23
  Bottom Layer w0.127: v1(18.844,-17.774) 18.844,-19.55 J3.14@18.864,-19.57
PA4: J3.12 U1.22 | length 15.3
  Top Layer w0.127: J3.12@17.594,-19.57 17.584,-19.56 17.604,-19.54 v1(17.604,-17.77) 17.737,-17.77 18.217,-17.291 18.217,-16.784 18.578,-16.422 19.982,-16.422 21.769,-14.636 21.769,-13.539 24.437,-10.871 U1.22 U1.22
  Bottom Layer w0.127: J3.12@17.594,-19.57 17.604,-19.56 v1(17.604,-17.77)
PA5: J3.10 U1.21 | length 17.3
  Top Layer w0.127: v1(16.289,-17.482) 16.289,-19.535 J3.10@16.324,-19.57 ; v1@16.324,-17.482 16.324,-17.437 17.592,-16.168 19.877,-16.168 21.502,-14.543 21.502,-13.194 24.563,-10.134 25.421,-10.134 U1.21
  Bottom Layer w0.127: v1(16.289,-17.482) 16.289,-19.535 J3.10@16.324,-19.57
PA8: J3.8 U1.20 | length 18.7
  Top Layer w0.127: J3.8@15.054,-19.57 15.043,-19.559 v1(15.043,-17.77) 15.048,-17.765 15.459,-17.765 15.661,-17.563 15.661,-17.235 15.663,-17.235 16.983,-15.914 19.772,-15.914 21.235,-14.451 21.235,-12.826 24.727,-9.334 25.421,-9.334 U1.20
  Bottom Layer w0.127: v1(15.043,-17.77) 15.043,-19.559 J3.8@15.054,-19.57
PA9_UART1_TX: J1.11 J3.6 U1.19 | length 28
  Top Layer w0.127: J3.6@13.784,-19.57 13.945,-19.409 13.675,-19.139 13.908,-18.905 13.804,-18.801 v1(13.804,-17.77) 14.426,-17.148 14.426,-16.784 15.549,-15.66 19.667,-15.66 20.968,-14.359 20.968,-12.336 24.771,-8.534 25.421,-8.534 U1.19 ; v1(14.184,-13.59) 15.824,-13.59 16.204,-13.97 J1.11@16.6,-13.97
  Bottom Layer w0.127: J3.6@13.784,-19.57 13.804,-19.55 v1(13.804,-17.77) 14.404,-17.17 14.404,-15.56 14.184,-15.34 v1(14.184,-13.59)
PA10_UART1_RX: J1.9 J3.4 U1.18 | length 32.5
  Top Layer w0.127: J3.4@12.514,-19.55 v1(12.514,-17.77) 12.514,-16.324 13.432,-15.406 19.561,-15.406 20.701,-14.267 20.701,-12.05 24.233,-8.518 24.233,-8.278 24.778,-7.733 25.421,-7.733 U1.18 ; v1(12.514,-13.26) 12.514,-13.124 13.065,-12.573 15.457,-12.573 J1.9@16.6,-11.43
  Bottom Layer w0.127: J3.4@12.514,-19.57 12.514,-19.55 v1(12.514,-17.77) v1(12.514,-13.26)
PA11: J3.1 U1.2 | length 51.4
  Top Layer w0.127: J3.1@11.244,-23.57 11.264,-23.55 v1(11.264,-21.78) ; U1.2 34.184,-1.603 34.389,-1.398 35.758,-1.398 35.857,-1.497 35.857,-1.883 v1(35.884,-1.91)
  Bottom Layer w0.127: J3.1@11.244,-23.57 11.264,-23.55 v1(11.264,-21.78) 11.136,-21.78 10.983,-21.627 10.978,-21.627 10.689,-21.338 10.68,-21.338 10.376,-21.034 10.376,-21.025 10.28,-20.929 10.28,-16.11 11.05,-15.34 11.05,-6.788 12.484,-5.354 19.322,-5.354 20.254,-4.422 20.254,-3.084 20.26,-3.078 20.26,-3.05 22.802,-0.508 25.813,-0.508 26.675,-1.37 34.294,-1.37 34.834,-1.91 v1(35.884,-1.91)
PA12: J3.3 U1.1 | length 50
  Top Layer w0.127: J3.3@12.514,-23.57 12.514,-23.55 v1(12.514,-21.78) ; U1.1 34.984,-2.574 35.17,-2.76 v1(35.861,-2.76) v1@35.884,-2.76
  Bottom Layer w0.127: J3.3@12.514,-23.57 12.514,-23.55 v1(12.514,-21.78) 11.874,-21.14 10.85,-21.14 10.794,-21.084 10.785,-21.084 10.63,-20.929 10.63,-20.92 10.55,-20.84 10.55,-16.199 11.304,-15.445 11.304,-6.893 12.589,-5.608 19.428,-5.608 20.508,-4.528 20.508,-3.189 20.514,-3.183 20.514,-3.156 22.907,-0.762 25.708,-0.762 26.57,-1.624 33.74,-1.624 34.876,-2.76 v1(35.861,-2.76)
PB2: J3.11 R6.2 U1.37 | length 68.3
  Top Layer w0.127: v1(17.594,-21.78) 17.594,-23.55 17.594,-23.57 J3.11@17.668,-23.644 ; v1(31.289,-22.53) 32.546,-22.53 R6.2 32.698,-22.378 32.698,-21.796 33.074,-21.42 37.24,-21.42 37.814,-20.846 37.814,-13.075 37.209,-12.47 U1.37
  Bottom Layer w0.127: J3.11@17.594,-23.55 v1(17.594,-21.78) 18.222,-21.152 18.222,-17.524 20.842,-14.903 20.842,-5.632 21.554,-4.92 21.554,-3.61 22.512,-2.652 24.465,-2.652 25.793,-3.98 25.793,-10.506 28.107,-12.82 29.928,-12.82 30.17,-13.062 30.17,-21.411 v1(31.289,-22.53)
PB7: J3.13 R7.2 U1.38 | length 71.9
  Top Layer w0.127: J3.13@18.864,-23.57 18.864,-23.55 v1(18.864,-21.78) 19.478,-21.166 19.478,-17.643 19.994,-17.127 v1(20.641,-17.127) ; v1(31.289,-24.089) 32.459,-24.089 32.69,-24.32 32.7,-24.31 32.7,-23.51 32.9,-23.31 36.37,-23.31 36.54,-23.14 36.54,-21.977 36.781,-21.736 37.418,-21.736 38.074,-21.08 38.074,-12.43 37.524,-11.88 36.744,-11.88 36.534,-11.67 U1.38
  Bottom Layer w0.127: J3.13@18.864,-23.57 18.864,-23.55 v1(18.864,-21.78) ; v1(20.641,-17.127) 20.746,-17.127 20.754,-17.134 21.096,-16.791 21.096,-5.738 21.814,-5.02 21.814,-3.71 22.618,-2.906 24.36,-2.906 25.539,-4.086 25.539,-10.63 27.996,-13.087 29.544,-13.087 29.91,-13.453 29.91,-22.71 v1(31.289,-24.089)
PB12: J3.2 U1.17 | length 24.4
  Top Layer w0.127: J3.2@11.264,-19.55 11.244,-19.57 11.244,-19.55 v1(11.244,-17.77) 11.244,-17.235 13.326,-15.152 19.456,-15.152 20.434,-14.175 20.434,-11.895 23.882,-8.447 23.882,-8.271 24.326,-7.826 24.326,-7.378 24.771,-6.933 25.421,-6.933 U1.17
  Bottom Layer w0.127: J3.2@11.244,-19.57 11.244,-19.55 v1(11.244,-17.77)
PB13: J3.19 U1.16 | length 21.3
  Top Layer w0.127: J3.19@22.674,-23.357 22.674,-23.337 22.961,-23.05 23.33,-23.05 23.96,-22.42 v1(23.96,-21.98) ; v1(24.284,-6.081) 25.473,-6.081 U1.16 U1.16@25.495,-6.081
  Bottom Layer w0.127: J3.19@22.72,-22.44 22.796,-22.364 23.576,-22.364 v1(23.96,-21.98) ; v1@23.96,-22.214 v1(23.96,-21.98) ; v1(24.284,-6.081) 23.904,-6.461 23.904,-16.96 24.154,-17.21 24.154,-21.654 23.96,-21.848 v1(23.96,-21.98)
PB14: J3.17 U1.15 | length 23.7
  Top Layer w0.127: J3.17@21.404,-23.57 v1(21.404,-21.78) ; v1(24.284,-5.281) 25.473,-5.281 U1.15 U1.15@25.495,-5.281
  Bottom Layer w0.127: J3.17@21.404,-23.57 v1(21.404,-21.78) 23.068,-21.78 23.9,-20.948 23.9,-17.319 23.647,-17.066 23.647,-5.845 24.211,-5.281 v1(24.284,-5.281)
PB15: J3.15 U1.14 | length 25.6
  Top Layer w0.127: J3.15@20.134,-23.57 20.134,-23.55 v1(20.134,-21.78) ; v1(24.284,-4.481) 25.473,-4.481 U1.14 U1.14@25.495,-4.481
  Bottom Layer w0.127: J3.15@20.134,-23.55 v1(20.134,-21.78) 20.752,-21.163 23.326,-21.163 23.646,-20.842 23.646,-17.429 23.39,-17.173 23.39,-5.302 24.211,-4.481 v1(24.284,-4.481)
SWDCLK: J2.4 U1.42 | length 15.3
  Top Layer w0.127: U1.42 36.744,-8.47 36.935,-8.661 36.935,-9.132 37.637,-9.834 37.637,-10.483 v1(37.02,-11.1)
  Bottom Layer w0.127: J2.4@35.929,-20.08 35.999,-20.01 37.576,-20.01 37.8,-19.786 37.8,-19.41 37.799,-19.409 37.799,-11.879 v1(37.02,-11.1)
SWDIO: J2.2 U1.41 | length 15.5
  Top Layer w0.127: U1.41 35.734,-9.32 36.574,-9.32 36.934,-9.68 v1(36.934,-10.09)
  Bottom Layer w0.127: J2.2 37.612,-21.26 38.08,-20.792 38.08,-11.05 38.082,-11.048 38.082,-10.43 37.742,-10.09 v1(36.934,-10.09)
pads on no net: J1.8 J2.6 J2.7 J2.8 J2.9 U1.3 U1.8 U1.9 U1.10 U1.11 U1.28 U1.29 U1.30 U1.31 U1.45

## Polygon pours and split planes (outlines as drawn)
GND on Top Layer "GND_L01_P000" (solid, pour order 0): 9.15,-20.32 cw(c9.15,-20.82) 9.65,-20.82 9.65,-24.765 ccw(c10.285,-24.765) 10.285,-25.4 37.717,-25.4 ccw(c37.717,-24.765) 38.352,-24.765 38.352,-9.898 ccw(c37.852,-9.898) 37.852,-9.398 37.836,-9.398 cw(c37.836,-8.898) 37.336,-8.898 37.336,-5.834 cw(c37.836,-5.834) 37.836,-5.334 37.852,-5.334 ccw(c37.852,-4.834) 38.352,-4.834 38.352,-1.651 ccw(c37.717,-1.651) 37.717,-1.016 27.168,-1.016 cw(c27.168,-0.516) 26.668,-0.516 26.668,-0.5 ccw(c26.168,-0.5) 26.168,0 6.272,0 6.272,-7.239 5.84,-7.239 5.84,-19.82 ccw(c6.34,-19.82) 6.34,-20.32
GND on Bottom Layer "Bottom" (solid, pour order 2): 9.15,-20.32 cw(c9.15,-20.82) 9.65,-20.82 9.65,-24.765 ccw(c10.285,-24.765) 10.285,-25.4 37.717,-25.4 ccw(c37.717,-24.765) 38.352,-24.765 38.352,-9.898 ccw(c37.852,-9.898) 37.852,-9.398 37.836,-9.398 cw(c37.836,-8.898) 37.336,-8.898 37.336,-5.834 cw(c37.836,-5.834) 37.836,-5.334 37.852,-5.334 ccw(c37.852,-4.834) 38.352,-4.834 38.352,-1.651 ccw(c37.717,-1.651) 37.717,-1.016 27.168,-1.016 cw(c27.168,-0.516) 26.668,-0.516 26.668,-0.5 ccw(c26.168,-0.5) 26.168,0 6.272,0 6.272,-7.239 5.84,-7.239 5.84,-19.82 ccw(c6.34,-19.82) 6.34,-20.32

## Keep-outs
Keep-Out Layer:
  lines w0.013: -0.002,-6.096 -0.002,-0.635 cw(c0.633,-0.635) 0.633,0 26.168,0 cw(c26.168,-0.5) 26.668,-0.5 26.668,-0.516 ccw(c27.168,-0.516) 27.168,-1.016 37.717,-1.016 cw(c37.717,-1.651) 38.352,-1.651 38.352,-4.834 cw(c37.852,-4.834) 37.852,-5.334 37.836,-5.334 ccw(c37.836,-5.834) 37.336,-5.834 37.336,-8.898 ccw(c37.836,-8.898) 37.836,-9.398 37.852,-9.398 cw(c37.852,-9.898) 38.352,-9.898 ; -0.002,-5.969 ccw(c0.633,-5.969) 0.633,-6.604 5.205,-6.604 cw(c5.205,-7.239) 5.84,-7.239 5.84,-19.82 ccw(c6.34,-19.82) 6.34,-20.32 9.15,-20.32 cw(c9.15,-20.82) 9.65,-20.82 9.65,-24.765 ccw(c10.285,-24.765) 10.285,-25.4 37.717,-25.4 ccw(c37.717,-24.765) 38.352,-24.765 38.352,-9.906

## Other copper
Top Layer:
  pour cut-out: 25.99,-4.16 34.6,-4.16 34.6,-12.11 34.59,-12.12 25.99,-12.12

## Silkscreen, mask and mechanical layers (free items; w line width, h text height)
Top Overlay:
  circle w0.1: c27.054,-22.94 r0.35
  lines w0.1: 25.573,-22.94 26.684,-22.94 ; 25.741,-22.754 25.574,-22.94 25.746,-23.122 ; 27.054,-22.94 28.194,-22.94
  text "Out2" at 11.431,-3.087 h0.8 r90
  text "Out1" at 14.901,-3.087 h0.8 r90
  text "Out3" at 11.417,-7.867 h0.8
  text "v1.1" at 6.44,-15.89 h1.1 r270
  text "B12" at 11.641,-17.837 h0.8 r90
  text "A10" at 12.871,-17.837 h0.8 r90
  text "A9" at 14.127,-17.837 h0.8 r90
  text "A8" at 15.397,-17.837 h0.8 r90
  text "A5" at 16.668,-17.837 h0.8 r90
  text "A4" at 17.939,-17.837 h0.8 r90
  text "A3" at 19.21,-17.837 h0.8 r90
  text "A2" at 20.48,-17.837 h0.8 r90
  text "3V3" at 21.751,-17.837 h0.8 r90
  text "GND" at 23.022,-17.837 h0.8 r90
  text "A11" at 9.904,-21.99 h0.8
  text "12" at 11.814,-21.99 h0.8
  text "B3" at 13.154,-21.99 h0.8
  text "8" at 14.764,-21.99 h0.8
  text "A0" at 15.624,-21.99 h0.8
  text "B2" at 17.154,-21.99 h0.8
  text "7" at 18.634,-21.99 h0.8
  text "15" at 19.544,-21.99 h0.8
  text "14" at 20.851,-21.99 h0.8
  text "13" at 22.174,-21.99 h0.8
Bottom Overlay:
  lines w0.013: 7.618,-13.97 11.428,-13.97 ; 7.618,-11.43 11.428,-11.43 ; 7.618,-8.89 11.428,-8.89 ; 7.618,-3.81 11.428,-3.81 ; 7.618,-1.27 11.428,-1.27 ; 14.984,-13.97 13.968,-13.97 ; 14.984,-11.43 13.968,-11.43 ; 14.984,-8.89 13.968,-8.89 ; 14.984,-3.81 13.968,-3.81 ; 14.984,-1.27 13.968,-1.27 ; 11.428,-13.97 11.428,-15.24 13.968,-15.24 13.968,-13.97 ; 11.428,-13.97 11.428,-11.43 ; 11.428,-11.43 11.428,-8.89 ; 11.428,-8.89 11.428,-3.81 ; 11.428,-3.81 11.428,-1.27 ; 11.428,-1.27 11.428,-0.508 13.968,-0.508 13.968,-1.27 ; 13.968,-13.97 13.968,-11.43 ; 13.968,-11.43 13.968,-8.89 ; 13.968,-8.89 13.968,-3.81 ; 13.968,-3.81 13.968,-1.27
  text "3v3" at 14.687,-9.317 h0.8
  text "Reset" at 23.537,-11.737 h0.8
  text "RX" at 14.687,-11.777 h0.8
  text "GND" at 22.204,-14.327 h0.8
  text "TX" at 14.687,-14.347 h0.8
  text "B12" at 11.641,-16.023 h0.8 r90
  text "A10" at 12.871,-16.023 h0.8 r90
  text "A9" at 14.127,-16.023 h0.8 r90
  text "A8" at 15.397,-16.023 h0.8 r90
  text "A5" at 16.668,-16.023 h0.8 r90
  text "A4" at 17.939,-16.023 h0.8 r90
  text "A3" at 19.21,-16.023 h0.8 r90
  text "A2" at 20.48,-16.023 h0.8 r90
  text "3V3" at 21.751,-16.023 h0.8 r90
  text "GND" at 23.022,-16.023 h0.8 r90
  text "2021-03-22" at 6.54,-19.62 h1.1 r270
  text "A11" at 11.505,-22.03 h0.8
  text "12" at 12.954,-22.03 h0.8
  text "B3" at 14.394,-22.03 h0.8
  text "8" at 15.304,-22.03 h0.8
  text "A0" at 16.934,-22.03 h0.8
  text "B2" at 18.334,-22.03 h0.8
  text "7" at 19.154,-22.03 h0.8
  text "15" at 20.704,-22.03 h0.8
  text "14" at 22.004,-22.03 h0.8
  text "13" at 23.304,-22.03 h0.8
Mechanical 15:
  lines w0.013: 3.81,-2.69 3.81,0 3.81,-2.69 ; 3.81,-2.69 3.81,-4.07 3.81,-2.69 ; 3.81,-2.69 0,-2.69 3.81,-2.69
  lines w0.254: 16.997,-1.202 ccw(c16.26,-1.27) 16.999,-1.24